# Altium PCB lab_1_samarin_usb_rs485.PcbDoc
Units mm, origin at the board's own origin, x right, y up, seen from the top; angles counter-clockwise.
Board outline 62.45 x 36.68 mm, 4 copper layers (Top Layer, Signal Layer 1, Signal Layer 2, Bottom Layer), stack 1.522 mm thick; 17 components, 24 nets, 81 pads, 5 vias.
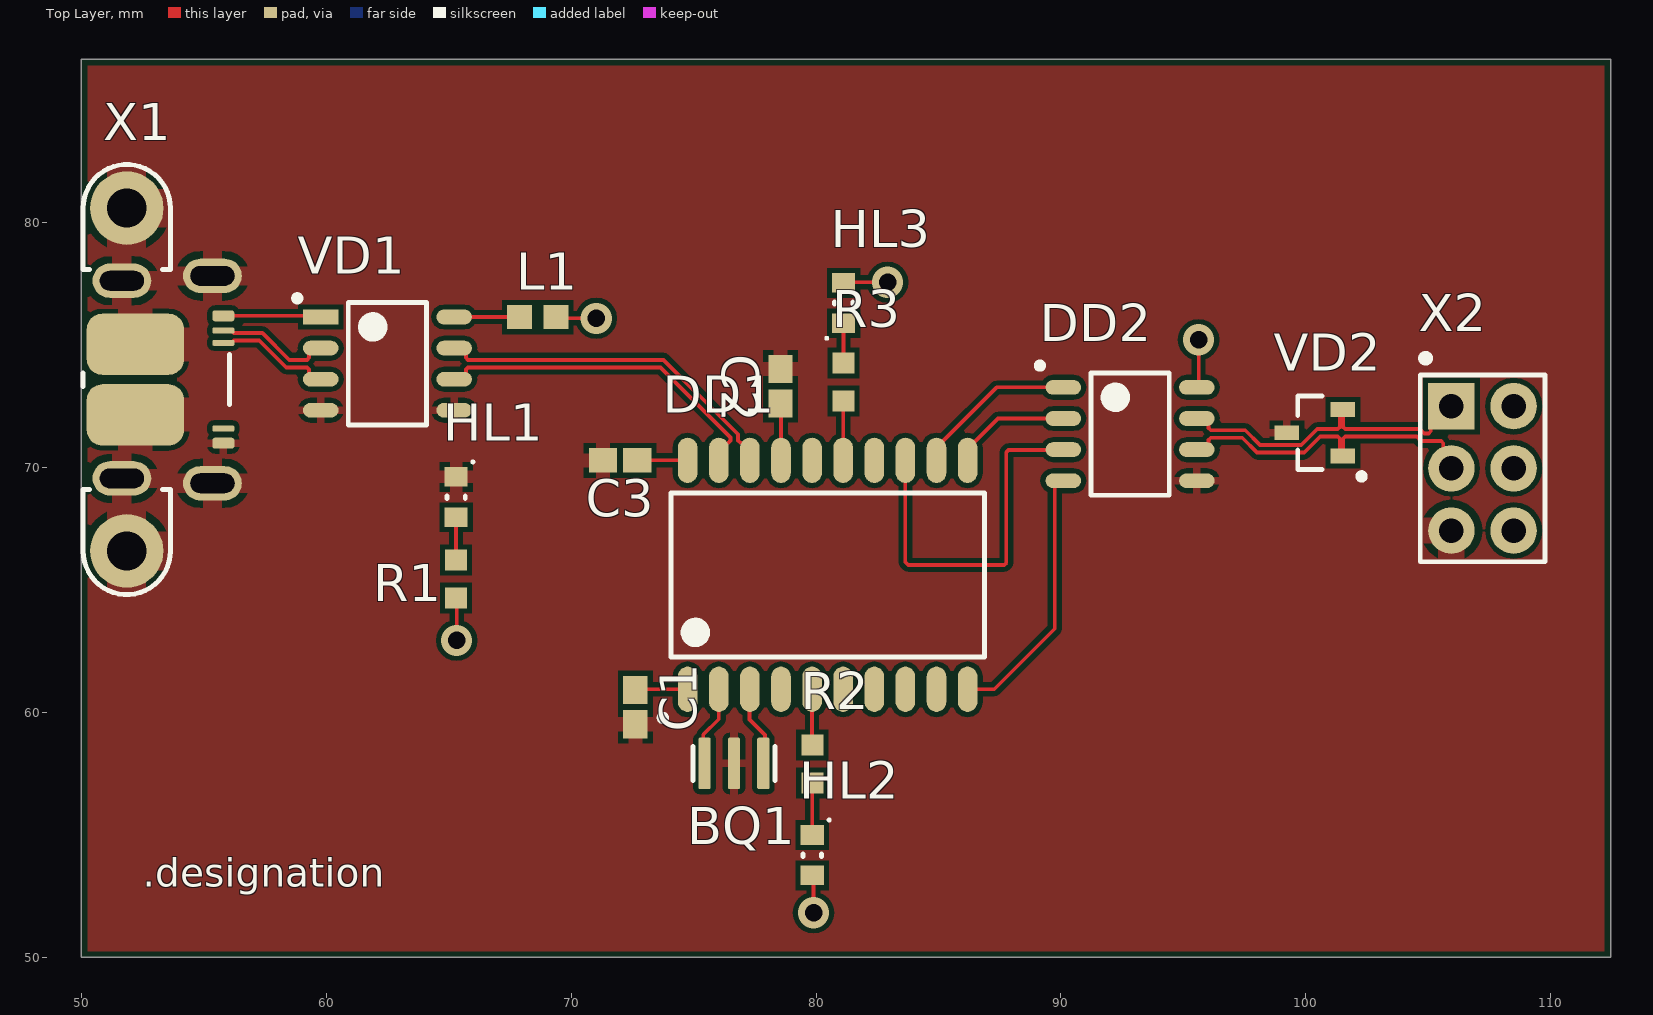
[diagram p0: Top Layer view]
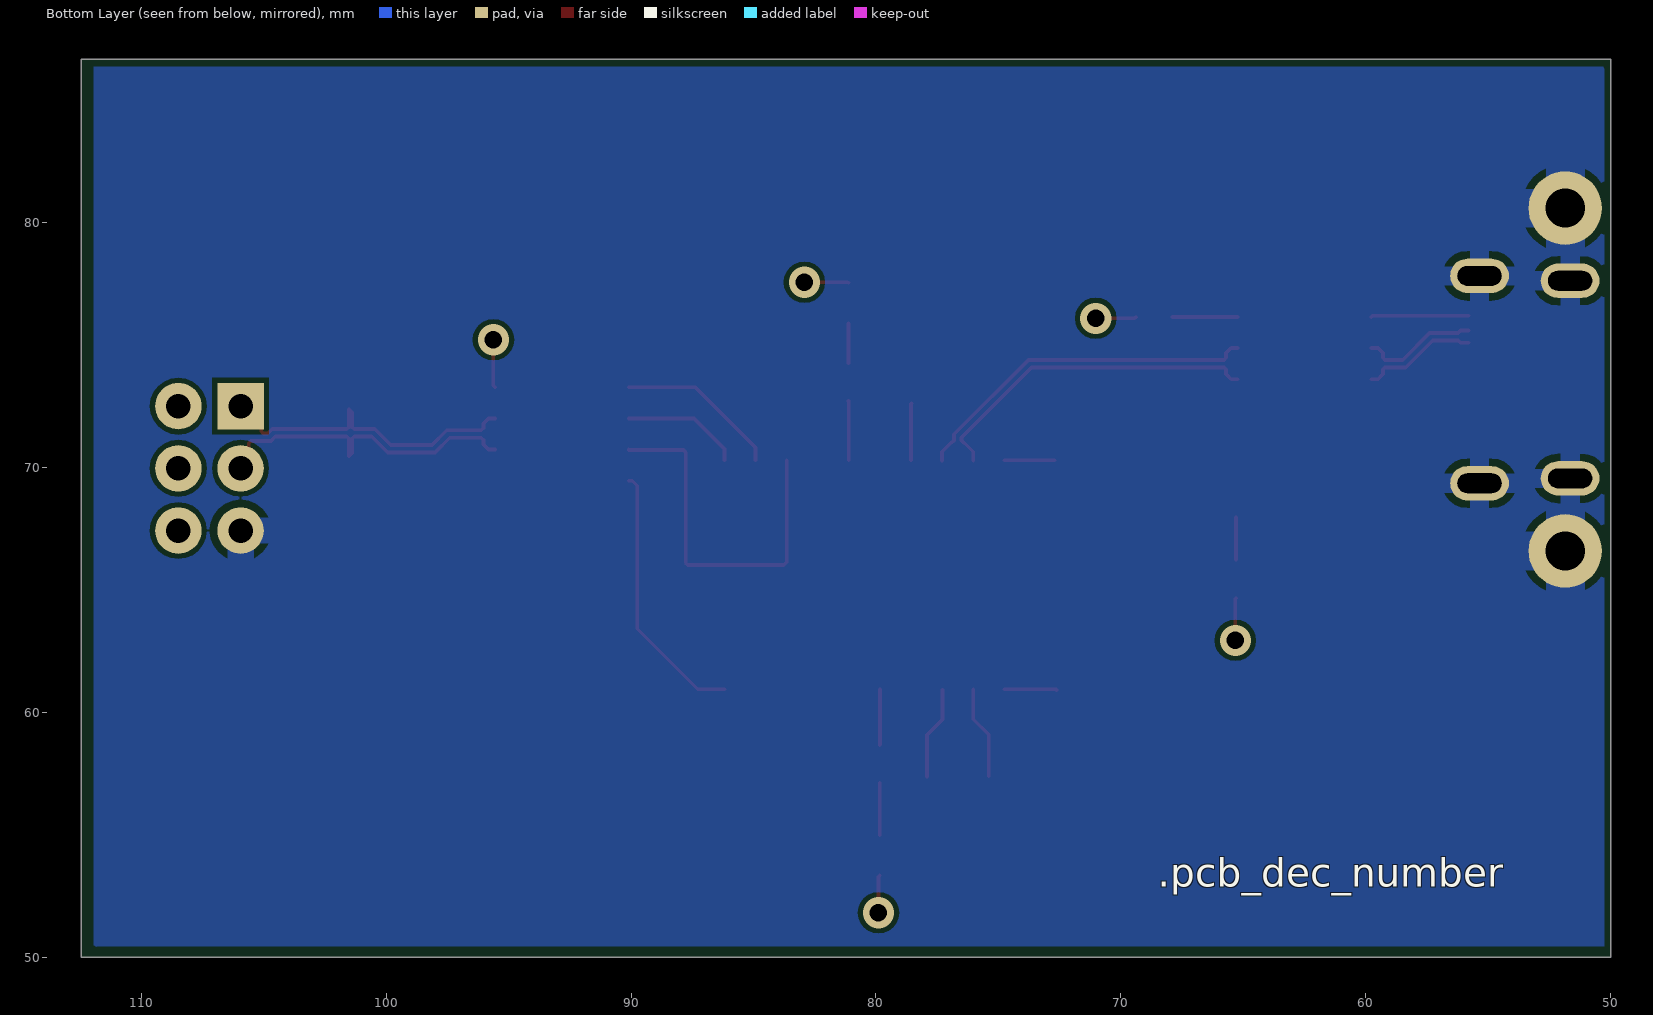
[diagram p1: Bottom Layer view, seen from below]
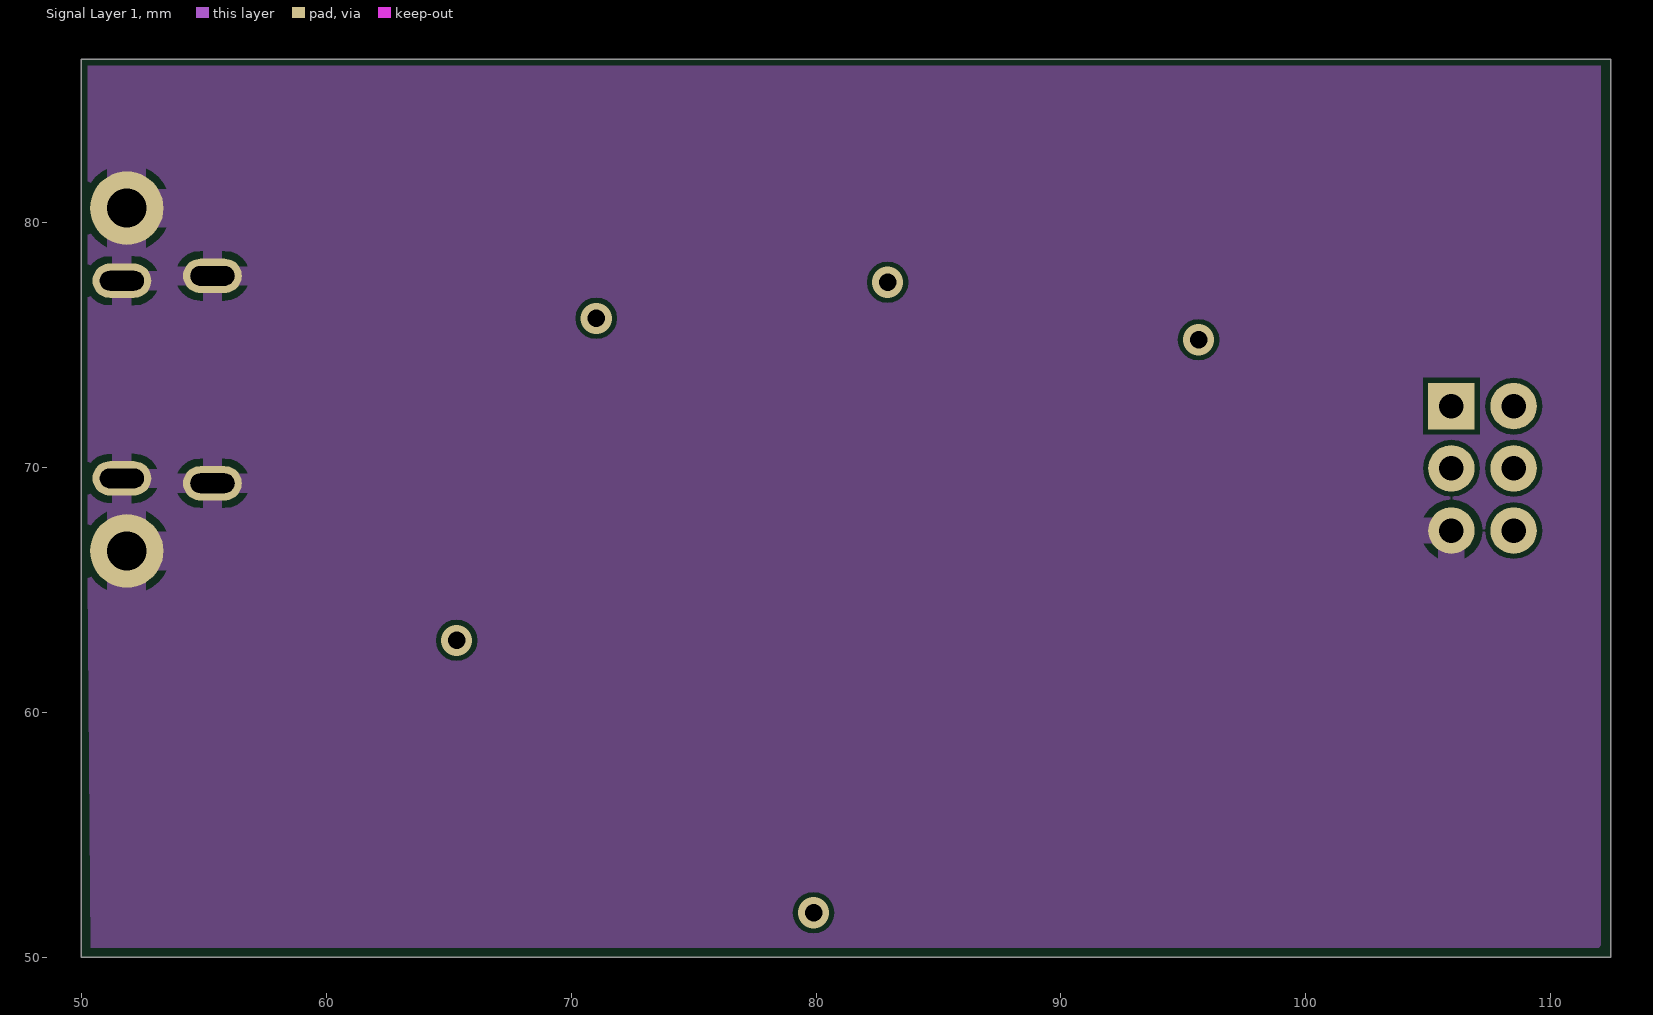
[diagram p2: Signal Layer 1]
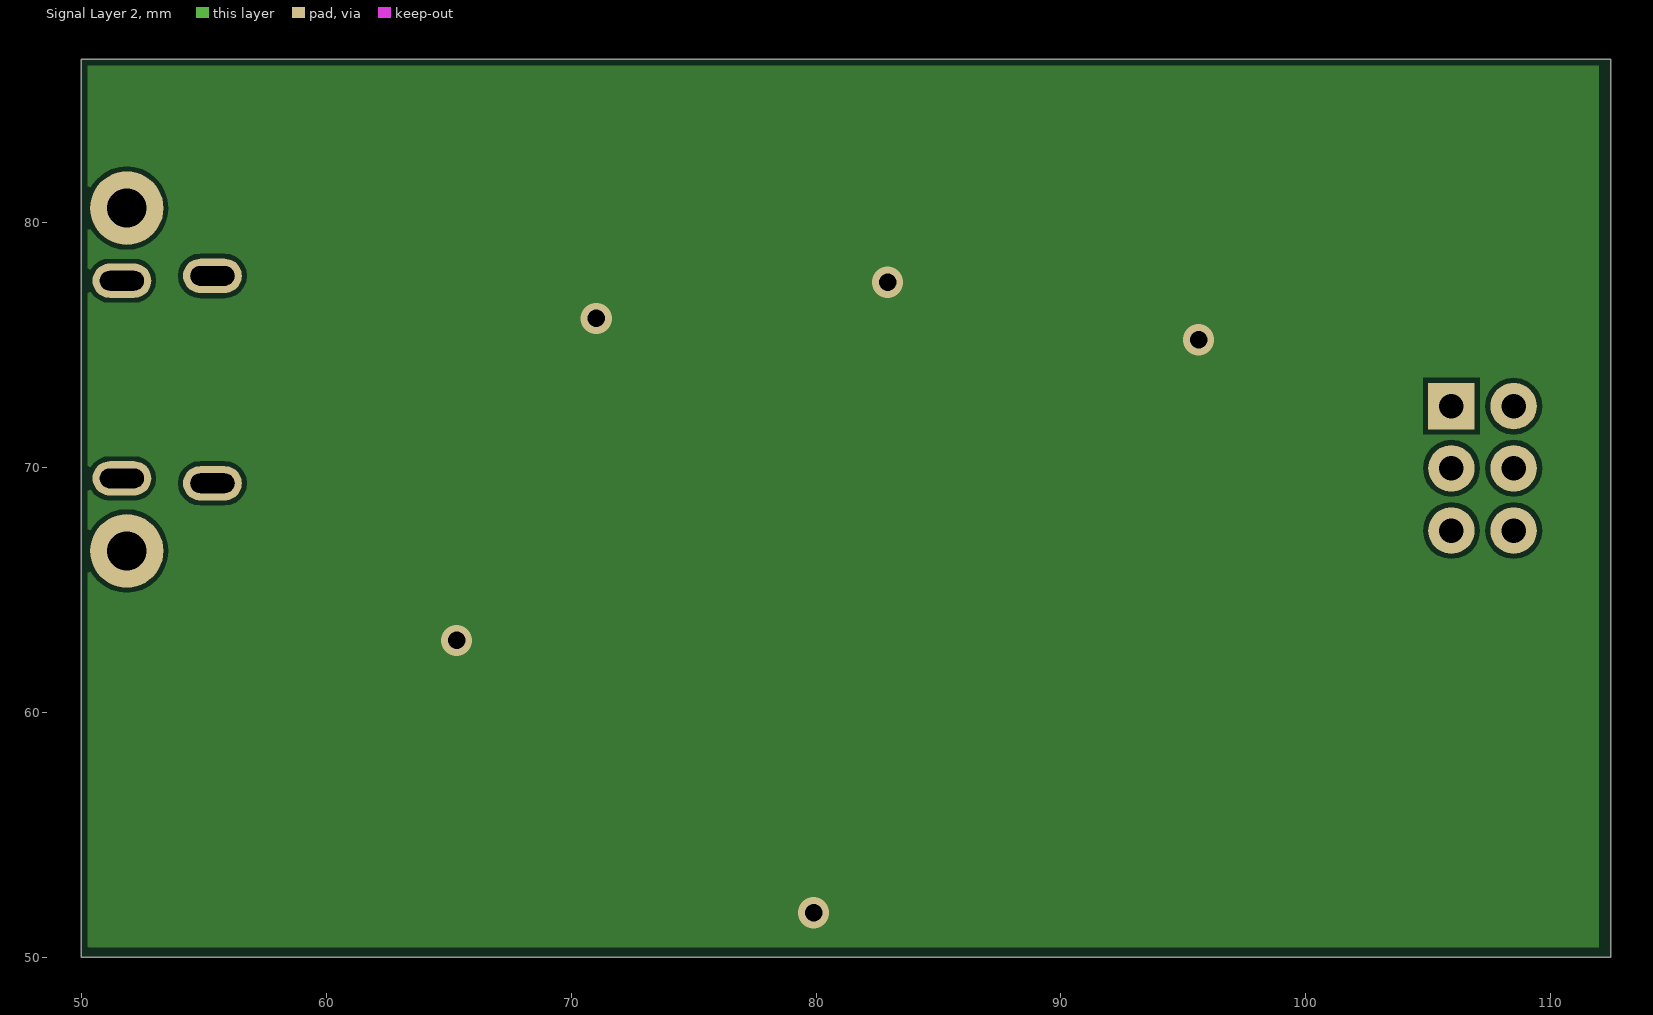
[diagram p3: Signal Layer 2]

## Layer stack, top to bottom
Top Solder: solder mask 0.0102, Solder Resist, Dk 3.5
Top Layer: signal copper 0.018
Prepreg 1: prepreg 0.125, FR4 HiTg170, Dk 5.07
Signal Layer 1: signal copper 0.018
Core 1: core 1.2, FR4, Dk 4.6
Signal Layer 2: signal copper 0.018
Prepreg 2: prepreg 0.125, FR4 HiTg170, Dk 5.07
Bottom Layer: signal copper 0.018
Bottom Solder: solder mask 0.0102, Solder Resist, Dk 3.5

## Board outline
50,50 112.45,50 112.45,86.675 50,86.675

## Design rules (kind name [scope] priority, off if disabled: settings)
AcuteAngle min_acute_angle [OnCopper] p1: minimum=3.50000000000000E+0001 checktracksonly=FALSE // Минимальный угол между примитивами топологии
BoardOutlineClearance board_outline_clearance_std [NOT (OnLayer('Bottom Overlay') OR OnLayer('Top Overlay'))] p1: gap=0.25 ignorepadtopadclearanceinfootprint=FALSE except(0: Arc-SplitContinuation Track-SplitContinuation SMDPad-SplitContinuation THPad-SplitContinuation Via-SplitContinuation Fill-SplitContinuation Poly-SplitContinuation Region-SplitContinuation Text-SplitContinuation) // Отступ элементов топологии от края фрезеруемой печатной платы
Clearance clearance_outer_18um_std [OnTopLayer OR OnBottomLayer] p1: gap=0.125 ignorepadtopadclearanceinfootprint=TRUE except(0.2: Arc-Fill Arc-Poly Track-Fill Track-Poly SMDPad-SMDPad SMDPad-Fill SMDPad-Poly THPad-Fill THPad-Poly Via-Fill Via-Poly Fill-Fill Fill-Poly Poly-Poly Poly-Region Poly-Text; 0.25: Arc-Hole Track-Hole SMDPad-Hole THPad-Hole Via-Hole Fill-Hole Poly-Hole Region-Hole Text-Hole) // Зазоры на внешних слоях
Clearance clearance_inner_18um_std [NOT (OnTopLayer Or OnBottomLayer)] p2: gap=0.125 ignorepadtopadclearanceinfootprint=FALSE except(0.2: Arc-Fill Arc-Poly Track-Fill Track-Poly SMDPad-SMDPad SMDPad-Fill SMDPad-Poly THPad-Fill THPad-Poly Via-Fill Via-Poly Fill-Fill Fill-Poly Poly-Poly Poly-Region Poly-Text; 0.25: Arc-Hole Track-Hole SMDPad-Hole THPad-Hole Via-Hole Fill-Hole Poly-Hole Region-Hole Text-Hole) // Зазоры на внутренних слоях
ComponentClearance [All] p1: gap=0 collisioncheckmode=3 verticalgap=0 showdistances=FALSE
DiffPairsRouting "Schematic Differential Pairs Routing_5" [InNet('RS485_N')] p1: maxlimit=0.254 minlimit=0.15 mostfreqgap=0.254 toplayer_maxgap=0.15 toplayer_prefgap=0.15 toplayer_minwidth=0.155 toplayer_maxwidth=0.155 toplayer_prefwidth=0.155 bottomlayer_maxgap=0.15 bottomlayer_prefgap=0.15 bottomlayer_minwidth=0.155 bottomlayer_maxwidth=0.155 bottomlayer_prefwidth=0.155 impedanceprofiledriven=TRUE impedanceprofileid={1B1F1868-2FFB-4D51-908A-913D90CA9AFC} impedanceprofilevalue=95.000000 maxuncoupledlength=12.7
DiffPairsRouting "Schematic Differential Pairs Routing_4" [InNet('RS485_P')] p2: maxlimit=0.254 minlimit=0.15 mostfreqgap=0.254 toplayer_maxgap=0.15 toplayer_prefgap=0.15 toplayer_minwidth=0.155 toplayer_maxwidth=0.155 toplayer_prefwidth=0.155 bottomlayer_maxgap=0.15 bottomlayer_prefgap=0.15 bottomlayer_minwidth=0.155 bottomlayer_maxwidth=0.155 bottomlayer_prefwidth=0.155 impedanceprofiledriven=TRUE impedanceprofileid={1B1F1868-2FFB-4D51-908A-913D90CA9AFC} impedanceprofilevalue=95.000000 maxuncoupledlength=12.7
DiffPairsRouting "Schematic Differential Pairs Routing_3" [InNet('USB_D_IN_N')] p3: maxlimit=0.254 minlimit=0.15 mostfreqgap=0.254 toplayer_maxgap=0.15 toplayer_prefgap=0.15 toplayer_minwidth=0.155 toplayer_maxwidth=0.155 toplayer_prefwidth=0.155 bottomlayer_maxgap=0.15 bottomlayer_prefgap=0.15 bottomlayer_minwidth=0.155 bottomlayer_maxwidth=0.155 bottomlayer_prefwidth=0.155 impedanceprofiledriven=TRUE impedanceprofileid={1B1F1868-2FFB-4D51-908A-913D90CA9AFC} impedanceprofilevalue=95.000000 maxuncoupledlength=12.7
DiffPairsRouting "Schematic Differential Pairs Routing_2" [InNet('USB_D_IN_P')] p4: maxlimit=0.254 minlimit=0.15 mostfreqgap=0.254 toplayer_maxgap=0.15 toplayer_prefgap=0.15 toplayer_minwidth=0.155 toplayer_maxwidth=0.155 toplayer_prefwidth=0.155 bottomlayer_maxgap=0.15 bottomlayer_prefgap=0.15 bottomlayer_minwidth=0.155 bottomlayer_maxwidth=0.155 bottomlayer_prefwidth=0.155 impedanceprofiledriven=TRUE impedanceprofileid={1B1F1868-2FFB-4D51-908A-913D90CA9AFC} impedanceprofilevalue=95.000000 maxuncoupledlength=12.7
DiffPairsRouting "Schematic Differential Pairs Routing_1" [InNet('USB_D_N')] p5: maxlimit=0.254 minlimit=0.15 mostfreqgap=0.254 toplayer_maxgap=0.15 toplayer_prefgap=0.15 toplayer_minwidth=0.155 toplayer_maxwidth=0.155 toplayer_prefwidth=0.155 bottomlayer_maxgap=0.15 bottomlayer_prefgap=0.15 bottomlayer_minwidth=0.155 bottomlayer_maxwidth=0.155 bottomlayer_prefwidth=0.155 impedanceprofiledriven=TRUE impedanceprofileid={1B1F1868-2FFB-4D51-908A-913D90CA9AFC} impedanceprofilevalue=95.000000 maxuncoupledlength=12.7
DiffPairsRouting "Schematic Differential Pairs Routing" [InNet('USB_D_P')] p6: maxlimit=0.254 minlimit=0.15 mostfreqgap=0.254 toplayer_maxgap=0.15 toplayer_prefgap=0.15 toplayer_minwidth=0.155 toplayer_maxwidth=0.155 toplayer_prefwidth=0.155 bottomlayer_maxgap=0.15 bottomlayer_prefgap=0.15 bottomlayer_minwidth=0.155 bottomlayer_maxwidth=0.155 bottomlayer_prefwidth=0.155 impedanceprofiledriven=TRUE impedanceprofileid={1B1F1868-2FFB-4D51-908A-913D90CA9AFC} impedanceprofilevalue=95.000000 maxuncoupledlength=12.7
DiffPairsRouting diff_pairs_routing [All] p7: maxlimit=0.254 minlimit=0.127 mostfreqgap=0.254 toplayer_maxgap=0.127 toplayer_prefgap=0.127 toplayer_minwidth=0.143 toplayer_maxwidth=0.143 toplayer_prefwidth=0.143 midlayer1_minwidth=0.381 midlayer1_maxwidth=0.381 midlayer1_prefwidth=0.381 midlayer2_minwidth=0.381 midlayer2_maxwidth=0.381 midlayer2_prefwidth=0.381 bottomlayer_maxgap=0.127 bottomlayer_prefgap=0.127 bottomlayer_minwidth=0.143 bottomlayer_maxwidth=0.143 bottomlayer_prefwidth=0.143 impedanceprofiledriven=TRUE impedanceprofileid={FD46899E-B5A2-4EF5-A302-5D2DB6A51F35} maxuncoupledlength=12.7 // Правила трассировки дифференциальных пар
HoleSize min_hole_size_std [IsPad] p1: absolutevalues=TRUE maxlimit=5.9 minlimit=0.6 maxpercent=80.000 minpercent=20.000 // Диаметр межслойного переходного отверстия
HoleSize min_hole_size_via_std [IsVia] p2: absolutevalues=TRUE maxlimit=5.9 minlimit=0.3 maxpercent=80.000 minpercent=20.000 // Минимальный диаметр монтажного отверстия
HoleToHoleClearance hole_to_hole_clearance_std [All] p1: gap=0.2 allowstackedmicrovias=FALSE // Минимальное расстояние между краями двух отверстий
MinimumAnnularRing min_via_ar_std [All] p1: minimumring=0.15 // Поясок площадки переходного отверстия (Annular ring VIA)
MinimumAnnularRing min_pad_ar_std [All] p2: minimumring=0.2 // Поясок монтажной контактной площадки (Annular ring PAD)
MinimumSolderMaskSliver min_solder_mask_bridge_std [All] p1: minsoldermaskwidth=0.15 // Мнимальная ширина масочного мостика
PlaneClearance plane_clearance_18um_std [All] p1: clearance=0.2 // Отступ полигона (для слоя plane) от элементов топологии
PlaneConnect [All] p1: planeconnectstyle=Relief reliefexpansion=0.5 reliefentries=4 reliefconductorwidth=0.2 reliefairgap=0.2
PolygonConnect poly_connect_to_pad<=0.3 [(AsMM(PadXSize_AllLayers)<=0.301) or (AsMM(PadYSize_AllLayers)<=0.301)] p1: thpad.connectstyle=Relief thpad.reliefconductorwidth=0.2 thpad.reliefentries=4 thpad.polygonreliefangle="90 Angle" thpad.airgapwidth=0.2 smdpad.connectstyle=Relief smdpad.reliefconductorwidth=0.2 smdpad.reliefentries=4 smdpad.polygonreliefangle="90 Angle" smdpad.airgapwidth=0.2 via.connectstyle=Direct via.reliefconductorwidth=0.254 via.reliefentries=4 via.polygonreliefangle="90 Angle" via.airgapwidth=0.254 // Правила подключения полигонов для падов от 0,3мм и меньше
PolygonConnect poly_connect_to_pad<=0.4 [(AsMM(PadXSize_AllLayers)<=0.401) or (AsMM(PadYSize_AllLayers)<=0.401)] p2: thpad.connectstyle=Relief thpad.reliefconductorwidth=0.26 thpad.reliefentries=4 thpad.polygonreliefangle="90 Angle" thpad.airgapwidth=0.2 smdpad.connectstyle=Relief smdpad.reliefconductorwidth=0.26 smdpad.reliefentries=4 smdpad.polygonreliefangle="90 Angle" smdpad.airgapwidth=0.2 via.connectstyle=Direct via.reliefconductorwidth=0.254 via.reliefentries=4 via.polygonreliefangle="90 Angle" via.airgapwidth=0.254 // Правила подключения полигонов для падов от 0,4 и меньше
PolygonConnect poly_connect_to_pad<=0.6 [(AsMM(PadXSize_AllLayers)<=0.601) or (AsMM(PadYSize_AllLayers)<=0.601)] p3: thpad.connectstyle=Relief thpad.reliefconductorwidth=0.33 thpad.reliefentries=4 thpad.polygonreliefangle="90 Angle" thpad.airgapwidth=0.2 smdpad.connectstyle=Relief smdpad.reliefconductorwidth=0.33 smdpad.reliefentries=4 smdpad.polygonreliefangle="90 Angle" smdpad.airgapwidth=0.2 via.connectstyle=Direct via.reliefconductorwidth=0.254 via.reliefentries=4 via.polygonreliefangle="90 Angle" via.airgapwidth=0.254 // Правила подключения полигонов для падов от 0,6мм и меньше
PolygonConnect poly_connect_to_pad<=0.7 [(AsMM(PadXSize_AllLayers)<=0.701) or (AsMM(PadYSize_AllLayers)<=0.701)] p4: thpad.connectstyle=Relief thpad.reliefconductorwidth=0.46 thpad.reliefentries=4 thpad.polygonreliefangle="90 Angle" thpad.airgapwidth=0.2 smdpad.connectstyle=Relief smdpad.reliefconductorwidth=0.46 smdpad.reliefentries=4 smdpad.polygonreliefangle="90 Angle" smdpad.airgapwidth=0.2 via.connectstyle=Direct via.reliefconductorwidth=0.254 via.reliefentries=4 via.polygonreliefangle="90 Angle" via.airgapwidth=0.254 // Правила подключения полигонов для падов от 0,7мм и меньше
PolygonConnect poly_connect_to_pad<=0.8 [(AsMM(PadXSize_AllLayers)<=0.8)or(AsMM(PadYSize_AllLayers)<=0.8)] p5: thpad.connectstyle=Relief thpad.reliefconductorwidth=0.53 thpad.reliefentries=4 thpad.polygonreliefangle="90 Angle" thpad.airgapwidth=0.3 smdpad.connectstyle=Relief smdpad.reliefconductorwidth=0.53 smdpad.reliefentries=4 smdpad.polygonreliefangle="90 Angle" smdpad.airgapwidth=0.2 via.connectstyle=Direct via.reliefconductorwidth=0.254 via.reliefentries=4 via.polygonreliefangle="90 Angle" via.airgapwidth=0.254 // Правила подключения полигонов для падов от 0,8мм и меньше
PolygonConnect poly_connect_to_pad<=1 [(AsMM(PadXSize_AllLayers)<=1.01)or(AsMM(PadYSize_AllLayers)<=1.01)] p6: thpad.connectstyle=Relief thpad.reliefconductorwidth=0.6 thpad.reliefentries=4 thpad.polygonreliefangle="90 Angle" thpad.airgapwidth=0.3 smdpad.connectstyle=Relief smdpad.reliefconductorwidth=0.6 smdpad.reliefentries=4 smdpad.polygonreliefangle="90 Angle" smdpad.airgapwidth=0.2 via.connectstyle=Direct via.reliefconductorwidth=0.254 via.reliefentries=4 via.polygonreliefangle="90 Angle" via.airgapwidth=0.254 // Правила подключения полигонов для падов от 1мм и меньше
PolygonConnect poly_connect_to_pad<=1.3 [(AsMM(PadXSize_AllLayers)<=1.31)or(AsMM(PadYSize_AllLayers)<=1.31)] p7: thpad.connectstyle=Relief thpad.reliefconductorwidth=0.66 thpad.reliefentries=4 thpad.polygonreliefangle="90 Angle" thpad.airgapwidth=0.3 smdpad.connectstyle=Relief smdpad.reliefconductorwidth=0.86 smdpad.reliefentries=4 smdpad.polygonreliefangle="90 Angle" smdpad.airgapwidth=0.2 via.connectstyle=Direct via.reliefconductorwidth=0.254 via.reliefentries=4 via.polygonreliefangle="90 Angle" via.airgapwidth=0.254 // Правила подключения полигонов для падов от 1,3мм и меньше
PolygonConnect poly_connect_to_pad<=1.6 [(AsMM(PadXSize_AllLayers)<=1.61)or(AsMM(PadYSize_AllLayers)<=1.61)] p8: thpad.connectstyle=Relief thpad.reliefconductorwidth=0.8 thpad.reliefentries=4 thpad.polygonreliefangle="90 Angle" thpad.airgapwidth=0.3 smdpad.connectstyle=Relief smdpad.reliefconductorwidth=1 smdpad.reliefentries=4 smdpad.polygonreliefangle="90 Angle" smdpad.airgapwidth=0.2 via.connectstyle=Direct via.reliefconductorwidth=0.254 via.reliefentries=4 via.polygonreliefangle="90 Angle" via.airgapwidth=0.254 // Правила подключения полигонов для падов от 1,6мм и меньше
PolygonConnect poly_connect_to_pad<=1.8 [(AsMM(PadXSize_AllLayers)<=1.8)or(AsMM(PadYSize_AllLayers)<=1.8)] p9: thpad.connectstyle=Relief thpad.reliefconductorwidth=1 thpad.reliefentries=4 thpad.polygonreliefangle="90 Angle" thpad.airgapwidth=0.3 smdpad.connectstyle=Relief smdpad.reliefconductorwidth=1.2 smdpad.reliefentries=4 smdpad.polygonreliefangle="90 Angle" smdpad.airgapwidth=0.2 via.connectstyle=Direct via.reliefconductorwidth=0.254 via.reliefentries=4 via.polygonreliefangle="90 Angle" via.airgapwidth=0.254 // Правила подключения полигонов для падов от 1,8мм и меньше
PolygonConnect poly_connect_to_pad<=2 [(AsMM(PadXSize_AllLayers)<=2.01)or(AsMM(PadYSize_AllLayers)<=2.01)] p10: thpad.connectstyle=Relief thpad.reliefconductorwidth=1.1 thpad.reliefentries=4 thpad.polygonreliefangle="90 Angle" thpad.airgapwidth=0.3 smdpad.connectstyle=Relief smdpad.reliefconductorwidth=1.4 smdpad.reliefentries=4 smdpad.polygonreliefangle="90 Angle" smdpad.airgapwidth=0.2 via.connectstyle=Direct via.reliefconductorwidth=0.254 via.reliefentries=4 via.polygonreliefangle="90 Angle" via.airgapwidth=0.254 // Правила подключения полигонов для падов от 2мм и меньше
PolygonConnect poly_connect_to_pad<=2.3 [(AsMM(PadXSize_AllLayers)<=2.31)or(AsMM(PadYSize_AllLayers)<=2.31)] p11: thpad.connectstyle=Relief thpad.reliefconductorwidth=1.2 thpad.reliefentries=4 thpad.polygonreliefangle="90 Angle" thpad.airgapwidth=0.3 smdpad.connectstyle=Relief smdpad.reliefconductorwidth=1.4 smdpad.reliefentries=4 smdpad.polygonreliefangle="90 Angle" smdpad.airgapwidth=0.2 via.connectstyle=Direct via.reliefconductorwidth=0.254 via.reliefentries=4 via.polygonreliefangle="90 Angle" via.airgapwidth=0.254 // Правила подключения полигонов для падов от 2,3мм и меньше
PolygonConnect poly_connect_to_pad<=2.5 [(AsMM(PadXSize_AllLayers)<=2.51)or(AsMM(PadYSize_AllLayers)<=2.51)] p12: thpad.connectstyle=Relief thpad.reliefconductorwidth=1.2 thpad.reliefentries=4 thpad.polygonreliefangle="90 Angle" thpad.airgapwidth=0.3 smdpad.connectstyle=Relief smdpad.reliefconductorwidth=1.4 smdpad.reliefentries=4 smdpad.polygonreliefangle="90 Angle" smdpad.airgapwidth=0.2 via.connectstyle=Direct via.reliefconductorwidth=0.254 via.reliefentries=4 via.polygonreliefangle="90 Angle" via.airgapwidth=0.254 // Правила подключения полигонов для падов от 2,5мм и меньше
PolygonConnect poly_connect_to_pad<=2.7 [(AsMM(PadXSize_AllLayers)<=2.71)or(AsMM(PadYSize_AllLayers)<=2.71)] p13: thpad.connectstyle=Relief thpad.reliefconductorwidth=1.4 thpad.reliefentries=4 thpad.polygonreliefangle="90 Angle" thpad.airgapwidth=0.3 smdpad.connectstyle=Relief smdpad.reliefconductorwidth=1.6 smdpad.reliefentries=4 smdpad.polygonreliefangle="90 Angle" smdpad.airgapwidth=0.2 via.connectstyle=Direct via.reliefconductorwidth=0.254 via.reliefentries=4 via.polygonreliefangle="90 Angle" via.airgapwidth=0.254 // Правила подключения полигонов для падов от 2,7мм и меньше
PolygonConnect poly_connect_to_pad<=3 [(AsMM(PadXSize_AllLayers)<=3.01)or(AsMM(PadYSize_AllLayers)<=3.01)] p14: thpad.connectstyle=Relief thpad.reliefconductorwidth=1.6 thpad.reliefentries=4 thpad.polygonreliefangle="90 Angle" thpad.airgapwidth=0.3 smdpad.connectstyle=Relief smdpad.reliefconductorwidth=1.8 smdpad.reliefentries=4 smdpad.polygonreliefangle="90 Angle" smdpad.airgapwidth=0.2 via.connectstyle=Direct via.reliefconductorwidth=0.254 via.reliefentries=4 via.polygonreliefangle="90 Angle" via.airgapwidth=0.254 // Правила подключения полигонов для падов от 3мм и меньше
PolygonConnect poly_connect_to_pad<=7 [(AsMM(PadXSize_AllLayers)<7.01)or(AsMM(PadYSize_AllLayers)<=7.01)] p15: thpad.connectstyle=Relief thpad.reliefconductorwidth=2 thpad.reliefentries=4 thpad.polygonreliefangle="90 Angle" thpad.airgapwidth=0.4 smdpad.connectstyle=Relief smdpad.reliefconductorwidth=2 smdpad.reliefentries=4 smdpad.polygonreliefangle="90 Angle" smdpad.airgapwidth=0.3 via.connectstyle=Direct via.reliefconductorwidth=0.254 via.reliefentries=4 via.polygonreliefangle="90 Angle" via.airgapwidth=0.254 // Правила подключения полигонов для падов от 7мм и меньше
PolygonConnect poly_connect_to_pad [All] p16: thpad.connectstyle=Relief thpad.reliefconductorwidth=0.25 thpad.reliefentries=4 thpad.polygonreliefangle="90 Angle" thpad.airgapwidth=0.2 smdpad.connectstyle=Relief smdpad.reliefconductorwidth=0.25 smdpad.reliefentries=4 smdpad.polygonreliefangle="90 Angle" smdpad.airgapwidth=0.2 via.connectstyle=Direct via.reliefconductorwidth=0.25 via.reliefentries=4 via.polygonreliefangle="90 Angle" via.airgapwidth=0.2 // Правила подключения полигонов общие
RoutingCorners [All] p1 off: cornerstyle=45-Degree minsetback=2.5 maxsetback=2.5
RoutingVias [All] p1: holewidth=0.3 width=0.6 viastyle="Through Hole" minholewidth=0.3 minwidth=0.6 maxholewidth=5.9 maxwidth=6.4
SilkToSilkClearance silk_to_silk_clearance_std [All] p1 off: silktosilkclearance=0.15 // Отступ текста шелкографии от других примитивов шелкографии
SilkToSolderMaskClearance silk_to_solder_mask_clearance_std [IsPad] p1 off: minsilkscreentomaskgap=0.15 clearancetoexposedcopper=FALSE // Минимальное расстояние между элементами шелкографии и вскрытой медью
SolderMaskExpansion solder_mask_expansion_std [All] p1: expansion=0.05 // Припуск паяльной масски
UnRoutedNet [All] p1: checkbadconnections=TRUE
Width width_18um_std [All] p1: maxlimit=10 minlimit=0.125 preferedwidth=0.15 checkconnectedcopper=TRUE // Ширина проводников (общая)
19 further rules are at their usual default settings.

## Classes and differential pairs
differential pair class USB_SIGNALS: RS485 USB_D USB_D_IN
differential pair USB_D: +USB_D_P -USB_D_N
differential pair USB_D_IN: +USB_D_IN_P -USB_D_IN_N
differential pair RS485: +RS485_P -RS485_N

## Components (designator, comment, footprint, x,y, rotation, side; value= is the part's Value field where it differs from the comment)
BQ1 "CSTCE12M0G52A-R0" CSTCE-3-320X130X40 76.65,57.925 r90 top
C1 "4,7 мк" C0603 72.625,60.225 r90 top
C2 "2,2 мк" C0603 78.55,73.325 r270 top
C3 "0,22 мк" C0603 72,70.3 r0 top
DD1 "MCP2200" SOIC-20 80.475,65.625 r90 top
DD2 "ADM3485" SOIC-8 92.825,71.375 r0 top
HL1 "TLMY1000-GS08" HL0603 65.3,68.8 r270 top
HL2 "TLMO1100-GS08" HL0603 79.85,54.175 r270 top
HL3 "TLMG1100-GS08" HL0603 81.125,76.725 r90 top
L1 "BLM18PG221SN1D" BLM-2-0603 68.64,76.15 r0 top
R1 "220" R0603 65.3,65.45 r270 top
R2 "330" R0603 79.85,57.9 r270 top
R3 "330" R0603 81.125,73.5 r90 top
VD1 "USB6B1" SO-8 62.5,74.25 r0 top
VD2 "SM712-02HTG" SOT23-3 100.375,71.425 r180 top
X1 "2108877-1" 2108877-1 52.104,73.6 r90 top
X2 "DS1021-2*3SF11" DS1021-2X3SF11 107.22,69.975 r270 top

## Footprints (in the part's own frame and the unit in brackets; to place one, negate y for a bottom-side part, rotate by r counter-clockwise, add the part's x,y. Pads: shape width x height; smd on the part's side, far side on the other; paste and mask are expansions set on the pad)
2108877-1 [mm] "Micro USB-B, Flanged"
  rrect50% 0.45x0.9 smd: 1(2.6,-3.696) 5(-2.6,-3.696)
  rrect50% 0.25x0.9 smd: 2(2,-3.696) 3(1.5,-3.696) 4(-2,-3.696)
  round 3 hole 1.6: TP1(-7,0.25) TP1(7,0.25)
  oval 1.4x2.4 hole 0.8 slot 1.8 at 90 deg mask+0.102: TP1(-4.235,-3.25) TP1(-4.035,0.45) TP1(4.035,0.45) TP1(4.235,-3.25)
  rrect50% 2.5x3.98 smd: TP1(-1.441,-0.104) TP1(1.441,-0.104)
  silkscreen extent -8.78,-3.95 8.78,2.03, body extent -8.9,-3.95 8.9,3.95, height 3.39
BLM-2-0603 [mm] "Chip Inductor, 2-Leads, Body 1,60x0,80mm, IPC Medium Density"
  rect 1.02x0.98 smd: 1(-0.74,0) 2(0.74,0)
  body extent -0.88,-0.48 0.87,0.47, height 0.95
C0603 [mm] "Chip Capacitor, 2-Leads, Body 1,60x0,80mm, IPC Medium Density"
  rect 1.15x1 smd: 1(-0.7,0) 2(0.7,0)
  body extent -0.88,-0.48 0.87,0.47, height 0.95
CSTCE-3-320X130X40 [mm]
  rrect25% 2.1x0.5 smd paste-0.025 mask+0.1: 1(0,1.2) 2(0,0) 3(0,-1.2)
  silkscreen extent -0.7,-1.67 0.7,1.68, body extent -0.7,-1.68 0.7,1.67, height 0.75
DS1021-2X3SF11 [mm]
  rect 1.9x1.9 hole 1: 1(-2.54,-1.27)
  round 1.9 hole 1: 2(-2.54,1.27) 3(0,-1.27)
  round 1.9 hole 1 mask+0.102: 4(0,1.27) 5(2.54,-1.27) 6(2.54,1.27)
  silkscreen extent -4.5,-2.55 3.81,2.54, body extent -3.81,-2.54 3.81,2.54, height 8.59
HL0603 [mm] "Chip Diode, 2-Leads, Body 1,60x0,80mm, IPC Medium Density"
  rect 0.8x0.95 smd: 1(-0.825,0) 2(0.825,0)
  silkscreen extent -1.49,-0.38 0.05,0.74, body extent -0.85,-0.45 0.85,0.45, height 0.65
R0603 [mm] "Chip Resistor, 2-Leads, Body 1,60x0,80mm, IPC Medium Density"
  rect 0.85x0.9 smd: 1(-0.775,0) 2(0.775,0)
  body extent -0.85,-0.45 0.85,0.45, height 0.55
SO-8 [mm] "SOIC, 8-Leads, Body 4,90x3,90mm, Pitch 1,27mm, IPC Medium Density"
  rect 1.45x0.6 smd: 1(-2.725,1.905)
  oval 1.45x0.6 smd: 2(-2.725,0.635) 3(-2.725,-0.635) 4(-2.725,-1.905) 5(2.725,-1.905) 6(2.725,-0.635) 7(2.725,0.635) 8(2.725,1.905)
  silkscreen extent -3.81,-2.5 1.6,2.79, body extent -2,-2.5 2,2.5, height 1.75
SOIC-8 [mm] "SOIC, 8-Leads, Body 4,90x3,90mm, Pitch 1,27mm, IPC Medium Density"
  oval 1.45x0.6 smd: 1(-2.725,1.905) 2(-2.725,0.635) 3(-2.725,-0.635) 4(-2.725,-1.905) 5(2.725,-1.905) 6(2.725,-0.635) 7(2.725,0.635) 8(2.725,1.905)
  silkscreen extent -3.81,-2.5 1.6,2.92, body extent -2,-2.5 2,2.5, height 1.75
SOIC-20 [mm] "SOIC, 20-Leads, Body 12,80x7,50mm, Pitch 1,27mm, IPC Medium Density"
  oval 1.85x0.8 smd: 1(-4.675,5.715) 2(-4.675,4.445) 3(-4.675,3.175) 4(-4.675,1.905) 5(-4.675,0.635) 6(-4.675,-0.635) 7(-4.675,-1.905) 8(-4.675,-3.175) 9(-4.675,-4.445) 10(-4.675,-5.715) 11(4.675,-5.715) 12(4.675,-4.445) 13(4.675,-3.175) 14(4.675,-1.905) 15(4.675,-0.635) 16(4.675,0.635) 17(4.675,1.905) 18(4.675,3.175) 19(4.675,4.445) 20(4.675,5.715)
  silkscreen extent -5.97,-6.4 3.35,6.86, body extent -3.75,-6.4 3.75,6.4, height 2.65
SOT23-3 [mm] "SOT23, 3-Leads, Body 2,92x2,37mm"
  rect 1x0.6 smd: 1(-1.145,0.95) 2(-1.145,-0.95) 3(1.145,0)
  silkscreen extent -2.03,-1.5 0.7,1.9, body extent -0.7,-1.52 0.7,1.52, height 1.12

## Part data
BQ1: library part q0001, "=Описание", HelpURL=https://www.murata.com/en-us/products/productdetail?partno=CSTCE12M0G52A-R0, ID=q0001, Корпус=3,2x1,3x0,4, Наименование=CSTCE12M0G52A-R0, Описание="Кварцевый резонатор 12 МГц", Производитель="Murata Manufacturing Co., Ltd.", Фамилия=Самарин, Частота="12 МГц"
C1: library part c0006, "=Описание", HelpURL=https://www.yageo.com/upload/media/product/productsearch/datasheet/mlcc/UPY-GPHC_X5R_4V-to-50V_26.pdf, ID=c0006, Корпус=0603, Наименование=CC0603KRX5R8BB475, Номинал="4,7 мк", Номинальное напряжение="25 В", Описание="Конденсатор чип 0603 4,7 мкФ 25 В ±10 %", Отклонение="±10 %", Производитель=Yageo, Рабочие температуры="от -55 °С до +85 °С", Фамилия=Ларионов
C2: library part c0005, "=Описание", HelpURL=https://www.yageo.com/upload/media/product/productsearch/datasheet/mlcc/UPY-GPHC_X5R_4V-to-50V_26.pdf, ID=c0005, Корпус=0603, Наименование=CC0603KRX5R9BB225, Номинал="2,2 мк", Номинальное напряжение="50 В", Описание="Конденсатор чип 0603 2,2 мкФ 50 В ±10 %", Отклонение="±10 %", Производитель=Yageo, Рабочие температуры="от -55 °С до +85 °С", Фамилия=Самарин
C3: library part c0003, "=Описание", HelpURL=https://www.yageo.com/upload/media/product/products/datasheet/mlcc/UPY-GPHC_X7R_6.3V-to-50V_20.pdf, ID=c0003, Корпус=0603, Наименование=CC0603JRX7R9BB224, Номинал="0,22 мк", Номинальное напряжение="50 В", Описание="Конденсатор чип 0603 0,22 мкФ 50 В ±5 %", Отклонение="±5 %", Производитель=Yageo, Рабочие температуры="от -55 °С до +125 °С", Фамилия=Самарин
DD1: library part dd0003, "=Описание", HelpURL=https://www.microchip.com/wwwproducts/en/en546923, ID=dd0003, Корпус=SOIC-20, Наименование=MCP2200, Описание="Преобразователь USB-UART", Производитель="Microchip Technology Inc.", Фамилия=Самарин
DD2: library part dd0004, "=Описание", HelpURL=https://www.analog.com/ru/products/adm3485.html#product-samplebuy, ID=dd0004, Корпус=SOIC-8, Наименование=ADM3485, Описание="Передатчик RS-485/RS-422", Производитель="Analog Devices, Inc.", Фамилия=Самарин
HL1: library part hl0003, "=Описание", HelpURL=https://www.vishay.com/leds/list/product-83172/, ID=hl0003, Корпус=0603, Наименование=TLMY1000-GS08, Номинальная длина волны="588 нм", Номинальная сила света="7,5 мкд", Номинальное падение напряжение="1,8 В", Номинальный прямой ток="15 мА", Описание="Светодиод чип 0603 желтый", Производитель="Vishay Intertechnology, Inc.", Рабочие температуры="от -40 °С до +100 °С", Рассеиваемая мощность="40 мВт", Фамилия=Ларионов, Цвет=Yellow
HL2: library part hl0004, "=Описание", HelpURL=https://www.vishay.com/leds/list/product-83173/, ID=hl0004, Корпус=0603, Наименование=TLMO1100-GS08, Номинальная длина волны="606 нм", Номинальная сила света="80 мкд", Номинальное падение напряжение="2,1 В", Номинальный прямой ток="30 мА", Описание="Светодиод чип 0603 оранжевый", Производитель="Vishay Intertechnology, Inc.", Рабочие температуры="от -40 °С до +100 °С", Рассеиваемая мощность="90 мВт", Фамилия=Ларионов, Цвет=Orange
HL3: library part hl0005, "=Описание", HelpURL=https://www.vishay.com/leds/list/product-83173/, ID=hl0005, Корпус=0603, Наименование=TLMG1100-GS08, Номинальная длина волны="570 нм", Номинальная сила света="35 мкд", Номинальное падение напряжение="2,1 В", Номинальный прямой ток="30 мА", Описание="Светодиод чип 0603 зеленый", Производитель="Vishay Intertechnology, Inc.", Рабочие температуры="от -40 °С до +100 °С", Рассеиваемая мощность="90 мВт", Фамилия=Ларионов, Цвет=Green
L1: library part l0002, "=Описание", HelpURL=https://www.murata.com/en-global/products/productdetail?partno=BLM18PG221SN1%23, ID=l0002, Корпус=0603, Наименование=BLM18PG221SN1D, Описание="Ферритовая бусина 220 Ом ±25 %", Отклонение, 100 Мгц="±25 %", Производитель="Murata Manufacturing Co., Ltd.", Рабочие температуры="от -55 °С до +125 °С", Сопротивление, 100 МГц="220 Ом", Сопротивление при постоянном токе="0,1 Ом", Фамилия=Самарин
R1: library part r0005, "=Описание", HelpURL=https://www.yageo.com/upload/media/product/productsearch/datasheet/rchip/PYu-RC_Group_51_RoHS_L_11.pdf, ID=r0005, Корпус=0603, Наименование=RC0603FR-07220RL, Номинал=220, Номинальное напряжение="75 В", Номинальный ток="1 А", Описание="Резистор чип 0603 220 Ом ±1 % 0,1 Вт", Отклонение="±1 %", Производитель=Yageo, Рабочие температуры="от -55 °С до +155 °С", Фамилия=Ларионов
R2 R3: library part r0006, "=Описание", HelpURL=https://www.yageo.com/upload/media/product/productsearch/datasheet/rchip/PYu-RC_Group_51_RoHS_L_11.pdf, ID=r0006, Корпус=0603, Наименование=RC0603FR-07330RL, Номинал=330, Номинальное напряжение="75 В", Номинальный ток="1 А", Описание="Резистор чип 0603 330 Ом ±1 % 0,1 Вт", Отклонение="±1 %", Производитель=Yageo, Рабочие температуры="от -55 °С до +155 °С", Фамилия=Ларионов
VD1: library part vd0005, "=Описание", HelpURL=https://www.st.com/content/st_com/en/products/protection-devices/esd-protection/usb-port-protection/usb6b1.html, ID=vd0005, Корпус=SO-8, Наименование=USB6B1, Описание="Диодная сборка для подавления помех, от 6 В", Производитель=STMicroelectronics, Фамилия=Ларионов
VD2: library part vd0003, "=Описание", HelpURL=https://www.littelfuse.com/products/tvs-diode-arrays/general-purpose-esd-protection/sm712.aspx, ID=vd0003, Корпус=SOT23-3, Наименование=SM712-02HTG, Описание="Диодная сборка для подавления помех, -7/12 В", Производитель="Littelfuse, Inc.", Фамилия=Самарин
X1: library part x0001, Contact_1=VBUS, Contact_2=D-, Contact_3=D+, Contact_4=ID, Contact_5=GND, HelpURL=https://www.te.com/global-en/product-2108877-1.html, ID=x0001, Наименование=2108877-1, Описание="USB 2.0 Micro USB Type B IP68 гнездо прямой угол", Производитель="TE Connectivity", Фамилия=Ларионов
X2: library part x0003, Contact_1=B, Contact_2=Contact_2, Contact_3=A, Contact_4=Contact_4, Contact_5=GND, Contact_6=Contact_6, HelpURL=http://www.connfly.com/productshow.aspx?id=118, ID=x0003, Наименование=DS1021-2*3SF11, Описание="PLS 3x2 pin 2,54 мм прямой", Производитель="Connfly Electronic Co. LTD", Фамилия=Самарин

## Via types
v1: diameter 1.27, hole 0.711, Top Layer to Bottom Layer, 5 vias

## Nets (pads, with @x,y where several pads share a name; then routed paths per layer and width w, separated by ;. In a path a pad name is that pad's centre, name@x,y a point inside that pad or via, vN(x,y) a via of type N, cw(c..) or ccw(c..) an arc to the next point about the centre after c; other vN are vias at no path point)
5V_IN: VD1.1 X1.1 | length 4
  Top Layer w0.15: X1.1 59.73,76.2 VD1.1
+5V: DD2.8 HL2.2 HL3.2 L1.2 R1.2 | length 8.7
  Top Layer w0.15: R1.2 65.325,64.65 v1(65.325,62.95) ; L1.2 69.43,76.1 v1(71.025,76.1) ; HL2.2 79.9,53.3 v1(79.9,51.825) ; HL3.2 81.15,77.575 v1(82.925,77.575) ; DD2.8 95.625,73.355 v1(95.625,75.225)
GND: BQ1.2 C1.1 C2.1 C3.1 DD2.5 HL1.1 VD1.4 VD1.5 VD2.3 X1.5 X1.TP1 X2.5
NetBQ1_1: BQ1.1 DD1.2 | length 3.8
  Top Layer w0.15: BQ1.1@75.4,57.4 75.4,59.1 76.03,59.73 DD1.2
NetBQ1_3: BQ1.3 DD1.3 | length 3.8
  Top Layer w0.15: DD1.3@77.285,60.935 77.285,59.715 77.915,59.085 BQ1.3@77.915,57.385
NetC1_2: C1.2 DD1.1 | length 2.1
  Top Layer w0.15: C1.2 72.65,60.95 DD1.1
NetC2_2: C2.2 DD1.17 | length 2.3
  Top Layer w0.15: C2.2 78.57,72.605 DD1.17
NetC3_2: C3.2 DD1.20 | length 2.1
  Top Layer w0.15: C3.2 DD1.20
NetDD1_10: DD1.10 DD2.4 | length 10.9
  Top Layer w0.15: DD1.10 87.275,60.95 89.75,63.425 89.75,69.262 89.958,69.47 DD2.4
NetDD1_11: DD1.11 DD2.2 | length 4.9
  Top Layer w0.15: DD1.11 86.19,70.765 87.435,72.01 DD2.2
NetDD1_12: DD1.12 DD2.1 | length 6.7
  Top Layer w0.15: DD1.12 84.92,70.825 87.375,73.28 DD2.1
NetDD1_13: DD1.13 DD2.3 | length 15.3
  Top Layer w0.15: DD1.13 83.65,66.138 83.763,66.025 87.687,66.025 87.775,66.113 87.775,70.637 87.863,70.725 90.085,70.725 DD2.3
NetHL1_2: HL1.2 R1.1 | length 1.7
  Top Layer w0.15: R1.1@65.3,66.25 HL1.2
NetHL2_1: HL2.1 R2.2 | length 2.1
  Top Layer w0.15: HL2.1 R2.2
NetHL3_1: HL3.1 R3.2 | length 1.6
  Top Layer w0.15: R3.2 HL3.1
NetL1_1: L1.1 VD1.8 | length 2.7
  Top Layer w0.15: VD1.8 67.895,76.155 L1.1
RS485_LINK: DD1.5 R2.1 | length 2.3
  Top Layer w0.15: DD1.5 79.84,58.685 R2.1
RS485_N: DD2.7 VD2.2 X2.1 | length 13.3
  Top Layer w0.155: DD2.7 95.821,72.01 96.026,71.804 96.026,71.618 96.117,71.528 97.532,71.528 98.137,70.922 99.814,70.922 100.469,71.578 101.303,71.578 101.394,71.668 101.394,72.249 VD2.2 101.52,71.668 101.611,71.578 102.807,71.578 104.658,71.578 104.838,71.398 105.012,71.398 105.103,71.488 105.103,71.668 X2.1
RS485_P: DD2.6 VD2.1 X2.3 | length 13.6
  Top Layer w0.155: DD2.6 95.821,70.74 96.026,70.946 96.026,71.132 96.117,71.222 97.406,71.222 98.011,70.617 99.94,70.617 100.595,71.272 101.303,71.272 101.394,71.182 101.394,70.601 VD2.1 101.52,71.182 101.611,71.272 102.934,71.272 104.532,71.272 104.712,71.092 105.523,71.092 105.616,71 105.616,70.309 X2.3
USB_CFG: DD1.15 R3.1 | length 2.4
  Top Layer w0.15: DD1.15 81.11,72.71 R3.1
USB_D_IN_N: VD1.2 X1.2 | length 4.8
  Top Layer w0.155: X1.2 56.125,75.6 56.222,75.503 57.39,75.503 58.49,74.403 59.208,74.403 59.299,74.493 59.299,74.679 59.504,74.885 VD1.2
USB_D_IN_P: VD1.3 X1.3 | length 4.8
  Top Layer w0.155: X1.3 56.125,75.1 56.222,75.197 57.264,75.197 58.364,74.097 59.208,74.097 59.299,74.007 59.299,73.821 59.504,73.615 VD1.3
USB_D_N: DD1.18 VD1.7 | length 14.4
  Top Layer w0.155: VD1.7 65.496,74.885 65.701,74.679 65.701,74.493 65.792,74.403 73.779,74.403 76.818,71.364 76.818,71.109 76.908,71.018 76.933,71.018 77.3,70.65 DD1.18
USB_D_P: DD1.19 VD1.6 | length 13.9
  Top Layer w0.155: VD1.6 65.496,73.615 65.701,73.821 65.701,74.007 65.792,74.097 73.652,74.097 76.512,71.237 76.512,71.109 76.422,71.018 76.397,71.018 76.03,70.65 DD1.19
pads on no net: DD1.4 DD1.6 DD1.7 DD1.8 DD1.9 DD1.14 DD1.16 X1.4 X2.2 X2.4 X2.6

## Polygon pours and split planes (outlines as drawn)
GND on Top Layer "GND_L01_P024" (solid, pour order 24): 49.975,50.175 112.325,50.175 112.375,50.125 112.375,86.65 50.125,86.65 50.05,86.725
GND on Signal Layer 1 "GND_L02_P026" (solid, pour order 26): 50.125,86.425 50.175,86.475 112.05,86.475 112.05,50.5 112.1,50.45 112.05,50.4 50.375,50.4
+5V on Signal Layer 2 "+5V_L03_P028" (solid, pour order 28): 50.25,86.475 50.25,50.375 50.3,50.425 111.975,50.425 111.975,86.425
GND on Bottom Layer "GND_L04_P030" (solid, pour order 30): 50.25,86.425 50.3,86.375 111.95,86.375 111.95,50.325 111.825,50.45 50.25,50.45

## Silkscreen, mask and mechanical layers (free items; w line width, h text height)
Top Overlay:
  text ".designation" at 52.5,52.5 h2
Bottom Overlay:
  text ".pcb_dec_number" at 68.5,52.5 h2
Board:
  the board outline again, w0.1
Assembly Notes (Mech5):
  text "'.title'" at 50,47.5 h2
  text "'.project'_'.pcb_dec_number'['.Pcb_File_Name_No_Path']" at 50,45 h2